# EAGLE board PCB-BMDShieldCon_v09-16 (EAGLE 7.5.0)
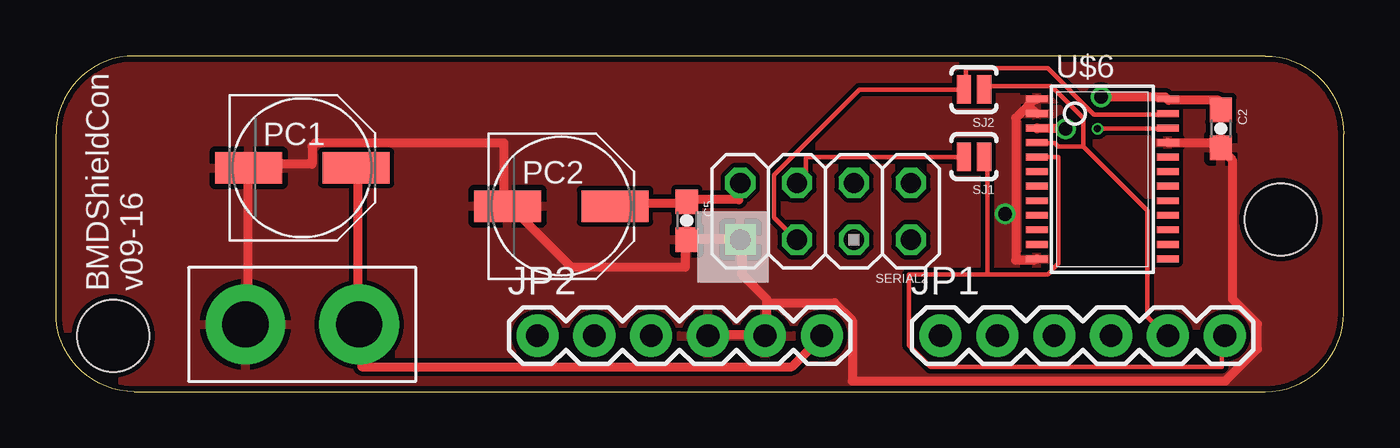
[diagram p0: board, top side]
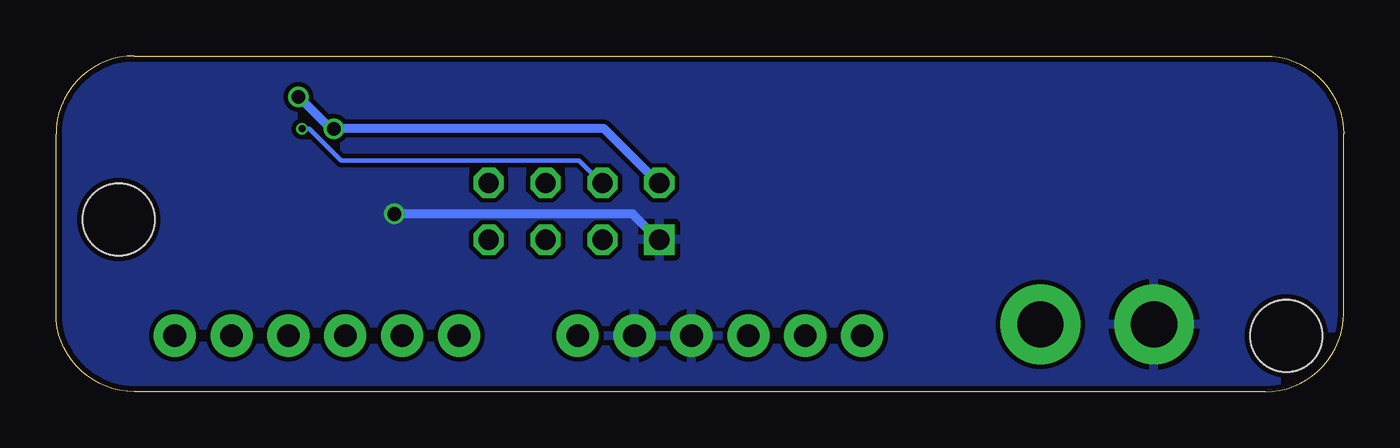
[diagram p1: board, bottom side, seen from below]

Size 57.5 x 15 mm. Coordinates in mm from the lower left corner, seen from the top.
Outline: 3.5,0 54,0 arc90 57.5,3.5 57.5,11.5 arc90 54,15 3.5,15 arc90 0,11.5 0,3.5 arc90 3.5,0
Copper layers (1*2*15*16): Top 0.035mm / dielectric 0.2mm / Route2 0.0175mm / dielectric 0.3mm / Route15 0.0175mm / dielectric 0.2mm / Bottom 0.035mm
Design rules "SeeedStudio_4layer_DRU_no_angle_20140221": minimum track width 8mil, minimum drill 12mil, track to track 8mil, track to pad 8mil, pad to pad 8mil, via to via 8mil, smd to smd 0mil, copper to edge 10mil, drill to drill 8mil, minimum pad ring 6mil, minimum via ring 4mil, stop-mask expansion 4mil, vias tented up to drill 100mil, thermal gap 10mil
Net classes: 0 default: width 0.203 mm, drill 0.305 mm, clearance 0.203 mm; 1 Power: width 0.406 mm, drill 0.61 mm, clearance 0.203 mm
Holes 3.2 mm at 2.55,2.49 54.7,7.69

## Footprints (pad centres in the part's own frame; a part is rotated, then mirrored left to right if it is on the bottom)
0603-CAP = smd 1.1 x 1: 1 -0.85,0; 2 0.85,0
1X06 = drill 1.016 pad 1.88: 1 0,0; 2 2.54,0; 3 5.08,0; 4 7.62,0; 5 10.16,0; 6 12.7,0
1X02_XTRA_BIG = drill 2.057 pad 3.556: 1 -2.54,0; 2 2.54,0
PANASONIC_D = smd 3 x 1.4: + 2.4,0; - -2.4,0
M2X4SMALLER = drill 0.9 square: 1 -1.27,3.81 | drill 0.9 octagon: 2 1.27,3.81; 3 -1.27,1.27; 4 1.27,1.27; 5 -1.27,-1.27; 6 1.27,-1.27; 7 -1.27,-3.81; 8 1.27,-3.81
SJ_2S-NO = smd 0.635 x 1.27: 1 -0.45,0; 2 0.45,0
TSSOP24 = smd 0.305 x 0.991: 1 -4.225,-2.918; 2 -3.575,-2.918; 3 -2.925,-2.918; 4 -2.275,-2.918; 5 -1.625,-2.918; 6 -0.975,-2.918; 7 -0.325,-2.918; 8 0.325,-2.918; 9 0.975,-2.918; 10 1.625,-2.918; 11 2.275,-2.918; 12 2.925,-2.918; 13 2.925,2.918; 14 2.275,2.918; 15 1.625,2.918; 16 0.975,2.918; 17 0.325,2.918; 18 -0.325,2.918; 19 -0.975,2.918; 20 -1.625,2.918; 21 -2.275,2.918; 22 -2.925,2.918; 23 -3.575,2.918; 24 -4.225,2.918

## Placement (x,y rotation side)
C2  100nF  [0603-CAP]  52.02,11.75 270 top
C5  100nF  [0603-CAP]  28.17,7.64 270 top
JP1  [1X06]  39.5,2.5 0 top
JP2  [1X06]  21.5,2.5 0 top
JP3  [1X02_XTRA_BIG]  11,3 0 top
PC1  47u  [PANASONIC_D]  11,10 0 top
PC2  47u  [PANASONIC_D]  22.57,8.29 0 top
SERIAL2  M04X2M2X4SMALLER  [M2X4SMALLER]  34.37,8.06 90 top
SJ1  SOLDERJUMPERNO  [SJ_2S-NO]  41,10.5 180 top
SJ2  SOLDERJUMPERNO  [SJ_2S-NO]  41,13.5 180 top
U$6  TCA9548A  [TSSOP24]  46.73,8.85 270 top

## Library data of the parts
C2 C5 JP1-JP3 SJ1 SJ2 = SparkFun
PC1 PC2 = rcl
SERIAL2 U$6 = SKAARHOJ

## Nets
5V [Power]: C2.1 C5.1 PC2.+ SERIAL2.2 U$6.3 U$6.24
GND [Power]: C2.2 C5.2 JP2.4 JP2.5 JP3.1 PC1.- PC2.- SERIAL2.1 U$6.1 U$6.2 U$6.12 U$6.21
I2C_SCL: SERIAL2.4 SJ1.2 U$6.22
I2C_SDA: SERIAL2.3 SJ2.2 U$6.23
N$1: JP1.6 SJ1.1 U$6.5
N$2 [Power]: JP2.6 JP3.2 PC1.+
N$3: JP1.5 SJ2.1 U$6.4

## Tracks (layer width: path | path; a pad name or v marks a point on that pad's centre or on a via)
5V  (via drill 0.61)
  Top 0.406: C2.1 51.91,12.7 51.91,13.02 49.69,13.02 U$6.24 49.53,13.18 v46.67,13.18 | v45.09,11.75 43.81,11.75 U$6.3 | SERIAL2.2 30.48,9.21 30.48,8.57 28.26,8.57 C5.1 28.1,8.41 25.08,8.41 PC2.+
  Bottom 0.406: SERIAL2.2 30.64,9.37 33.02,11.75 v45.09,11.75 45.24,11.75 v46.67,13.18
GND  (via drill 0.61)
  Top 0.406: U$6.21 49.69,11.11 51.91,11.11 51.91,10.95 C2.2 52.07,10.79 52.55,10.32 52.55,4.13 53.66,3.02 53.66,1.91 52.23,0.48 35.56,0.48 35.56,3.17 34.77,3.97 31.75,3.97 | 31.75,3.97 31.75,2.54 JP2.5 31.59,2.54 29.21,2.54 JP2.4 | JP3.1 8.57,3.02 8.57,9.84 PC1.- 8.73,10.16 11.43,10.16 11.43,10.95 11.59,11.11 20,11.11 20,8.41 PC2.- 20.32,8.26 23.02,5.56 28.1,5.56 28.1,6.67 C5.2 28.26,6.83 30.48,6.83 SERIAL2.1 30.64,6.67 30.64,5.24 31.75,4.13 31.75,3.97 | 42.86,7.94 42.86,12.22 43.42,12.78 | 42.86,7.94 42.86,5.87 43.66,5.87 U$6.12 | 43.42,12.78 43.66,13.02 U$6.1 | 43.42,12.78 43.66,12.54 U$6.2 | v42.39,7.94 42.86,7.94
  Bottom 0.406: v42.39,7.94 31.75,7.94 30.64,6.83 SERIAL2.1
  pour Top: 0,0 57.5,0 57.5,15 0,15
  pour Bottom: 0,0 57.5,0 57.5,15 0,15
I2C_SCL  (via drill 0.3)
  Top 0.203: v46.51,11.75 49.53,11.75 U$6.22 | SJ1.2 40.48,10.48 33.5,10.48 33.5,9.68 33.18,9.37 SERIAL2.4
  Bottom 0.203: v46.51,11.75 46.2,11.75 44.77,10.32 34.13,10.32 33.18,9.37 SERIAL2.4
I2C_SDA
  Top 0.203: U$6.23 49.53,12.38 46.35,12.38 44.29,14.45 40.64,14.45 40.64,13.65 SJ2.2 40.48,13.49 35.88,13.49 32.07,9.68 32.07,7.78 33.02,6.83 SERIAL2.3
N$1
  Top 0.203: 41.59,5.24 44.29,5.24 44.77,5.71 44.77,10.48 U$6.5 | 41.59,5.24 41.59,10.48 SJ1.1 | 41.59,5.24 38.1,5.24 38.1,2.06 39.05,1.11 52.07,1.11 52.07,2.38 JP1.6
N$2
  Top 0.406: PC1.+ 13.49,9.84 13.49,3.02 JP3.2 13.65,2.86 13.65,1.11 32.86,1.11 34.13,2.38 JP2.6
N$3
  Top 0.203: 45.88,10.95 44.77,10.95 44.61,11.11 43.81,11.11 U$6.4 | 45.88,10.95 45.88,12.22 44.45,13.65 41.59,13.65 SJ2.1 | 45.88,10.95 48.74,8.1 48.74,3.33 49.53,2.54 JP1.5

## Text on the board
KAP_MAAT1: GND | 12V
_tsilk: BMDShieldCon / v09-16